# EAGLE board LDR MODULE (EAGLE 6.5.0)
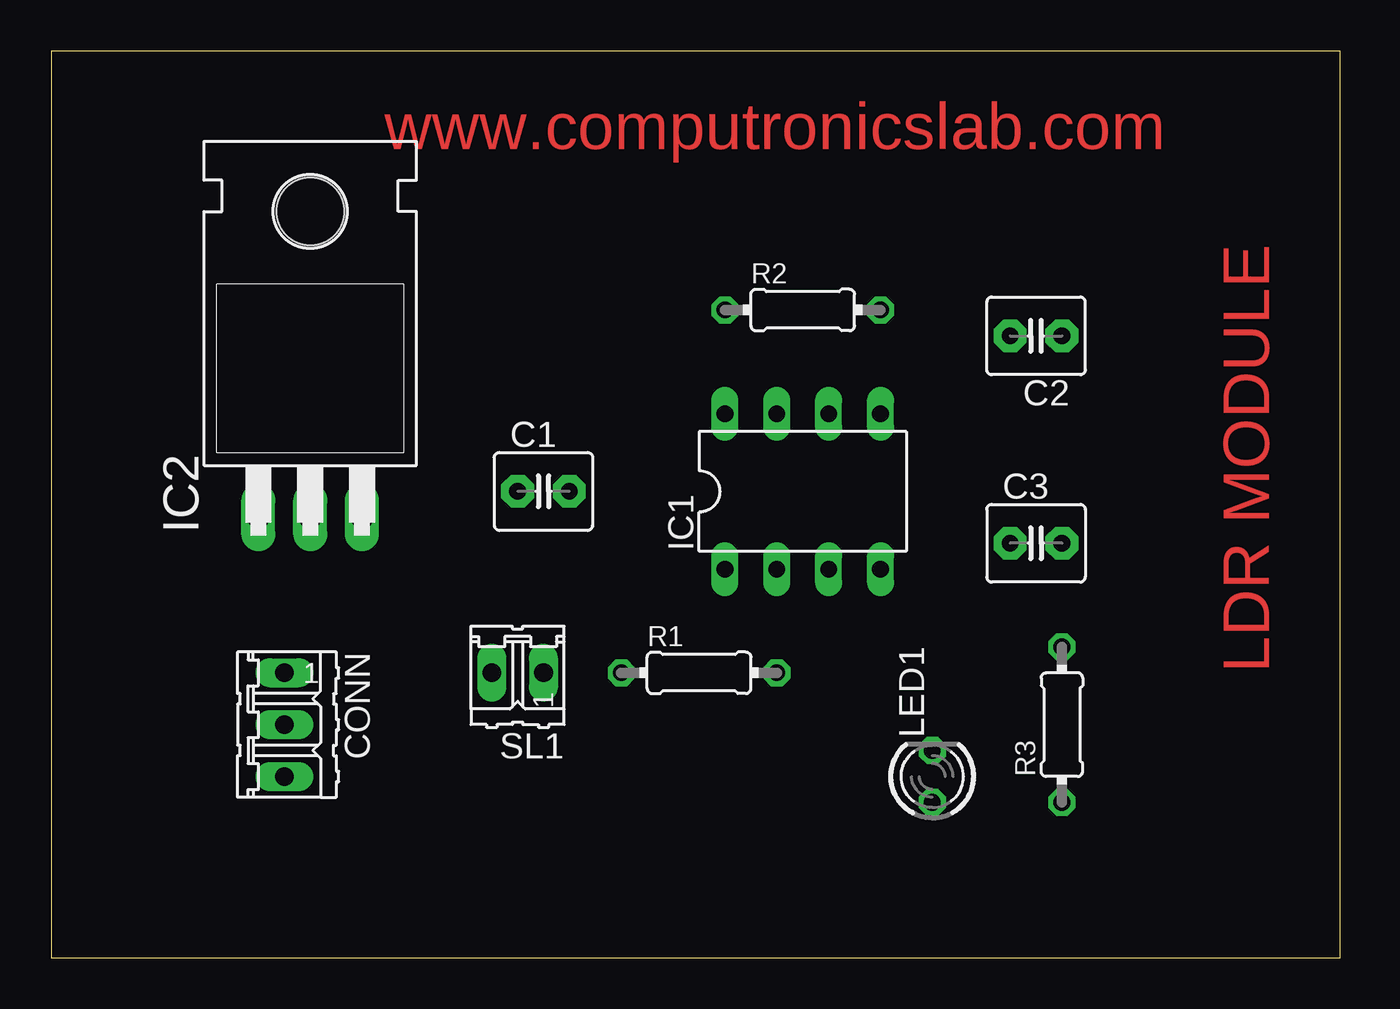
[diagram p0: board, top side]
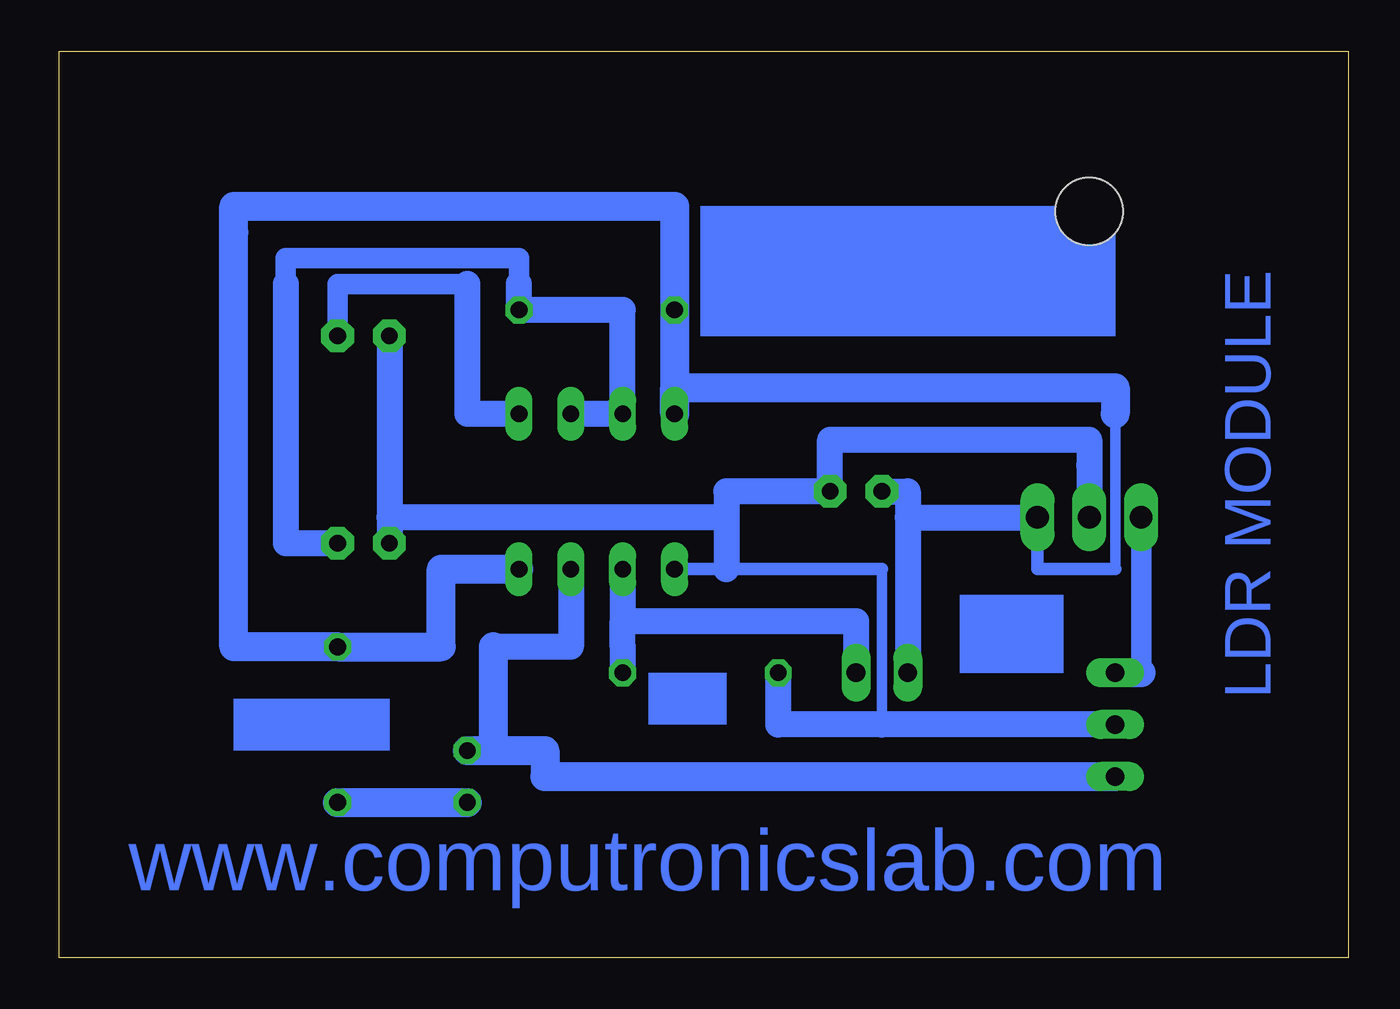
[diagram p1: board, bottom side, seen from below]

Size 63.17 x 44.44 mm. Coordinates in mm from the lower left corner, seen from the top.
Outline: 0,0 63.17,0 63.17,44.44 0,44.44 0,0
Copper layers (1*16): Top 0.035mm / dielectric 1.5mm / Bottom 0.035mm
Design rules "default": minimum track width 10mil, minimum drill 24mil, track to track 8mil, track to pad 8mil, pad to pad 8mil, via to via 8mil, smd to smd 8mil, copper to edge 40mil, drill to drill 8mil, minimum pad ring 10mil, minimum via ring 8mil, stop-mask expansion 4mil, vias tented up to drill 0mil, thermal gap 10mil

## Footprints (pad centres in the part's own frame; a part is rotated, then mirrored left to right if it is on the bottom)
C2.5-4 = drill 0.813 pad 1.6 octagon: 1 -1.27,0; 2 1.27,0
03P = drill 0.914 long: 1 -2.54,0; 2 0,0; 3 2.54,0
DIL-08 = drill 0.813 long: 1 -3.81,-3.81; 2 -1.27,-3.81; 3 1.27,-3.81; 4 3.81,-3.81; 5 3.81,3.81; 6 1.27,3.81; 7 -1.27,3.81; 8 -3.81,3.81
TO220H = drill 1.118 long: 1 -2.54,-10.16; 2 0,-10.16; 3 2.54,-10.16 | hole 3.302: 0,4.826
LED3MM = drill 0.813 octagon: A -1.27,0; K 1.27,0
0204/7 = drill 0.813 octagon: 1 -3.81,0; 2 3.81,0
02P = drill 0.914 long: 1 -1.27,0; 2 1.27,0

## Placement (x,y rotation side)
C1  .001uf  [C2.5-4]  24.13,22.86 0 top
C2  0.01uf  [C2.5-4]  48.26,30.48 180 top
C3  0.001uf  [C2.5-4]  48.26,20.32 0 top
CONN  3 PIN  [03P]  11.43,11.43 270 top
IC1  NE555  [DIL-08]  36.83,22.86 0 top
IC2  7805T  [TO220H]  12.7,31.75 0 top
LED1  3MM  [LED3MM]  43.18,8.89 90 top
R1  10K  [0204/7]  31.75,13.97 0 top
R2  100K  [0204/7]  36.83,31.75 0 top
R3  330E  [0204/7]  49.53,11.43 90 top
SL1  LDR  [02P]  22.86,13.97 180 top

## Library data of the parts
C1-C3 = capacitor-wima
CONN SL1 = con-amp-quick; OC_FARNELL: unknown; OC_NEWARK: unknown
IC1 = st-microelectronics; MF: Arrow Electronics; MPN: NE555N; OC_FARNELL: 1467742; OC_NEWARK: 89K1486
IC2 = linear
LED1 = led
R1-R3 = rcl

## Nets
N$1: C1.1 IC1.4 IC1.8 IC2.3 R2.1 R3.2 SL1.2
N$2: C3.2 IC1.6 IC1.7 R2.2
N$3: C2.1 IC1.5
N$4: IC1.2 R1.2 SL1.1
N$5: C1.2 C2.2 C3.1 CONN.2 IC1.1 IC2.2 R1.1
N$7: CONN.3 IC1.3 LED1.K
N$8: LED1.A R3.1
N$10: CONN.1 IC2.1

## Tracks (layer width: path | path; a pad name or v marks a point on that pad's centre or on a via)
N$1
  Bottom 0.508: 11.43,26.67 11.43,19.05
  Bottom 0.61: 11.43,19.05 15.24,19.05 IC2.3
  Bottom 1.27: 21.59,21.59 21.59,22.86 C1.1 | 21.59,21.59 SL1.2 | 21.59,21.59 IC2.3
  Bottom 1.422: IC1.4 44.45,19.05 44.45,15.24 R3.2 54.61,15.24 54.61,35.56 54.61,36.83 33.02,36.83 R2.1 IC1.8 33.02,27.94 11.43,27.94 11.43,26.67
N$2
  Bottom 1.016: 40.64,33.02 40.64,34.29 52.07,34.29 52.07,33.02
  Bottom 1.27: IC1.6 IC1.7 35.56,31.75 R2.2 40.64,33.02 | 52.07,33.02 52.07,20.32 C3.2
N$3
  Bottom 1.016: 43.18,33.02 49.53,33.02 49.53,31.75 C2.1
  Bottom 1.27: IC1.5 43.18,26.67 43.18,31.75 43.18,33.02
N$4
  Bottom 1.27: R1.2 35.56,15.24 35.56,16.51 | IC1.2 35.56,16.51 | 35.56,16.51 24.13,16.51 SL1.1
N$5
  Bottom 0.254: IC1.1 30.48,19.05 22.86,19.05
  Bottom 0.508: 22.86,19.05 22.86,11.43
  Bottom 0.61: IC1.1 22.86,19.05
  Bottom 1.27: CONN.2 22.86,11.43 27.94,11.43 R1.1 | C2.2 46.99,21.59 | 46.99,21.59 C3.1 | 30.48,21.59 30.48,22.86 C1.2 25.4,25.4 12.7,25.4 12.7,24.13 IC2.2 | 30.48,21.59 46.99,21.59 | 30.48,21.59 30.48,19.05
N$7
  Bottom 0.254: 41.91,10.16 LED1.K
  Bottom 1.27: IC1.3 38.1,15.24 41.91,15.24
  Bottom 1.422: 41.91,15.24 41.91,10.16 | LED1.K 39.37,10.16 39.37,8.89 CONN.3
N$8
  Bottom 1.422: R3.1 LED1.A
N$10
  Bottom 1.016: IC2.1 10.16,13.97
  Bottom 1.422: 10.16,13.97 CONN.1
(copper drawn outside any net)
  shapes: Bottom area x5

## Text on the board
Top: www.computronicslab.com | LDR MODULE
Bottom: LDR MODULE | www.computronicslab.com